# EAGLE board flossjtag-teardrops (EAGLE 7.4.0)
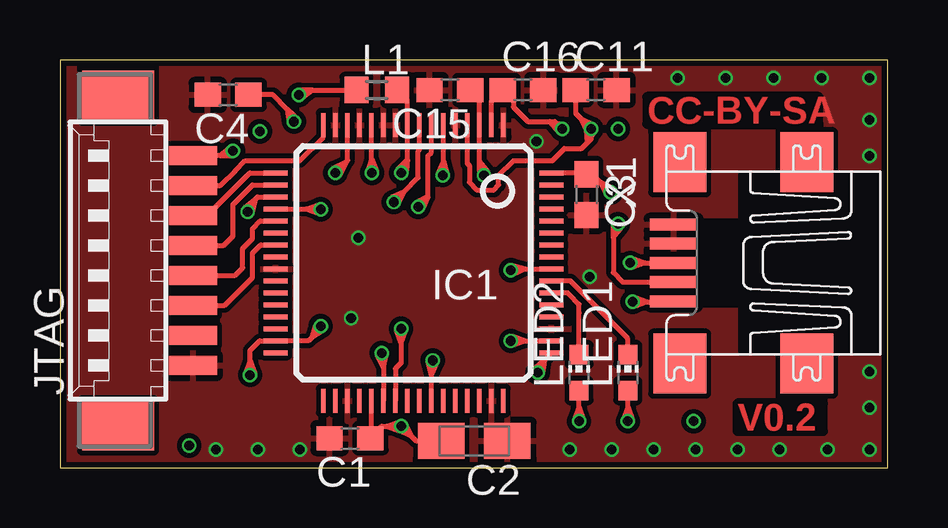
[diagram p0: board, top side]
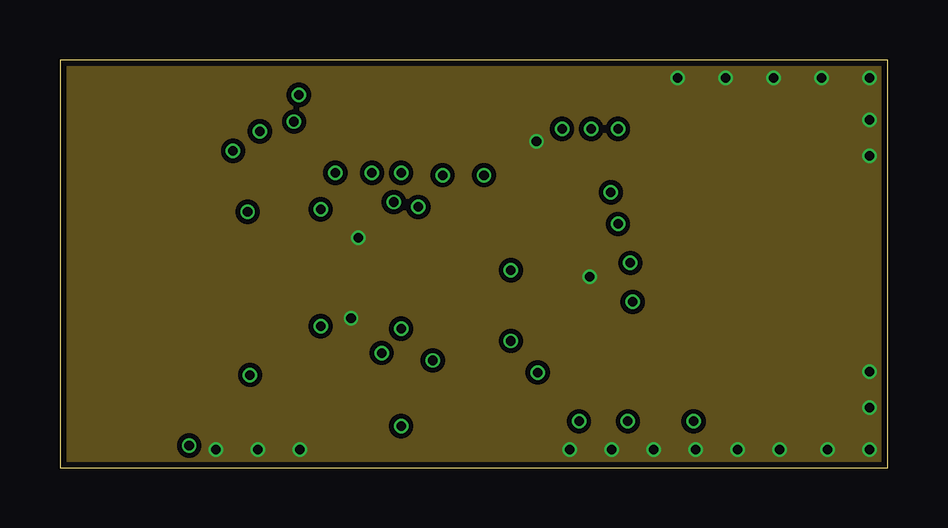
[diagram p1: board, inner layer Route2]
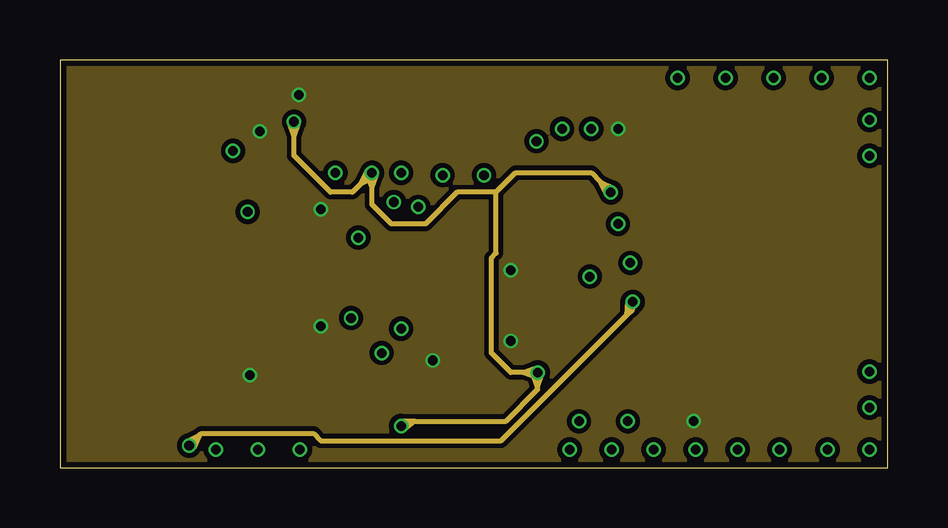
[diagram p2: board, inner layer Route15]
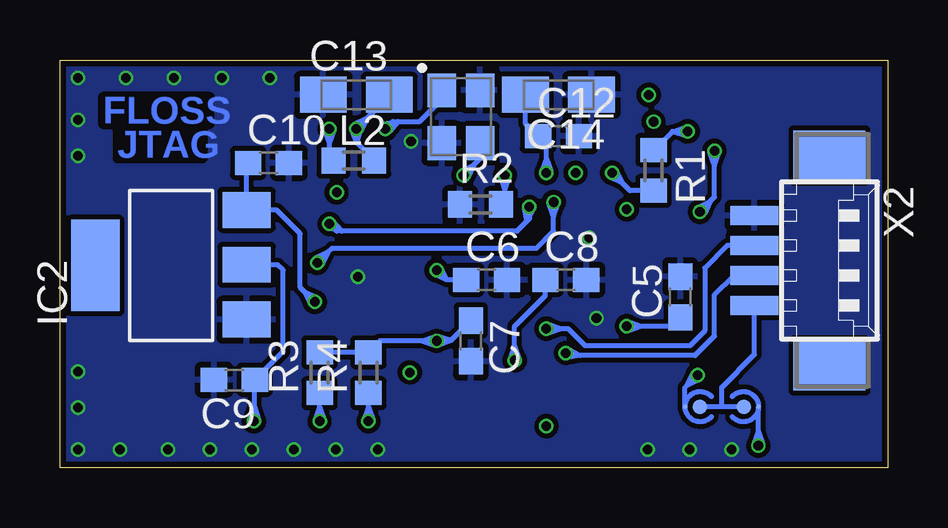
[diagram p3: board, bottom side, seen from below]

Size 34.5 x 17 mm. Coordinates in mm from the lower left corner, seen from the top.
Outline: 0,0 34.5,0 34.5,17 0,17 0,0
Copper layers (1*2+15*16): Top 0.035mm / dielectric 0.3mm / Route2 0.035mm / dielectric 0.15mm / Route15 0.035mm / dielectric 0.3mm / Bottom 0.035mm
Design rules "default *": minimum track width 7mil, minimum drill 0.4mm, track to track 8mil, track to pad 8mil, pad to pad 8mil, via to via 8mil, smd to smd 8mil, copper to edge 10mil, drill to drill 8mil, minimum pad ring 0.1mm, minimum via ring 0.1mm, stop-mask expansion 4mil, vias tented up to drill 0.4mm, thermal gap 10mil

## Footprints (pad centres in the part's own frame; a part is rotated, then mirrored left to right if it is on the bottom)
C0603 = smd 1.1 x 1: 1 -0.85,0; 2 0.85,0
A/3216-18R = smd 1.95 x 1.5: + 1.375,0; - -1.375,0
CIRC_JMP = smd 0.61 x 0.61: 1 0,0 | smd 0.203 x 0.203: 2 0,0.617
LQFP64 = smd 0.2 x 1: 1 -3.75,-5.75; 2 -3.25,-5.75; 3 -2.75,-5.75; 4 -2.25,-5.75; 5 -1.75,-5.75; 6 -1.25,-5.75; 7 -0.75,-5.75; 8 -0.25,-5.75; 9 0.25,-5.75; 10 0.75,-5.75; 11 1.25,-5.75; 12 1.75,-5.75; 13 2.25,-5.75; 14 2.75,-5.75; 15 3.25,-5.75; 16 3.75,-5.75; 33 3.75,5.75; 34 3.25,5.75; 35 2.75,5.75; 36 2.25,5.75; 37 1.75,5.75; 38 1.25,5.75; 39 0.75,5.75; 40 0.25,5.75; 41 -0.25,5.75; 42 -0.75,5.75; 43 -1.25,5.75; 44 -1.75,5.75; 45 -2.25,5.75; 46 -2.75,5.75; 47 -3.25,5.75; 48 -3.75,5.75 | smd 1 x 0.2: 17 5.75,-3.75; 18 5.75,-3.25; 19 5.75,-2.75; 20 5.75,-2.25; 21 5.75,-1.75; 22 5.75,-1.25; 23 5.75,-0.75; 24 5.75,-0.25; 25 5.75,0.25; 26 5.75,0.75; 27 5.75,1.25; 28 5.75,1.75; 29 5.75,2.25; 30 5.75,2.75; 31 5.75,3.25; 32 5.75,3.75; 49 -5.75,3.75; 50 -5.75,3.25; 51 -5.75,2.75; 52 -5.75,2.25; 53 -5.75,1.75; 54 -5.75,1.25; 55 -5.75,0.75; 56 -5.75,0.25; 57 -5.75,-0.25; 58 -5.75,-0.75; 59 -5.75,-1.25; 60 -5.75,-1.75; 61 -5.75,-2.25; 62 -5.75,-2.75; 63 -5.75,-3.25; 64 -5.75,-3.75
SOT223 = smd 1.499 x 2.007: 1 -2.261,-3.15; 2 0.025,-3.15; 3 2.311,-3.15 | smd 3.81 x 2.007: 4 0,3.15
53261-08 = smd 0.8 x 2: 1 4.375,-2.5; 2 3.125,-2.5; 3 1.875,-2.5; 4 0.625,-2.5; 5 -0.625,-2.5; 6 -1.875,-2.5; 7 -3.125,-2.5; 8 -4.375,-2.5 | smd 2.1 x 3: S1 6.875,0.625; S2 -6.875,0.625
R0603 = smd 1 x 1.1: 1 -0.85,0; 2 0.85,0
CHIP-LED0603 = smd 0.8 x 0.8: A 0,-0.75; C 0,0.75
UX60A-MB-5ST = smd 2 x 0.5: 1 2.25,1.6; 2 2.25,0.8; 3 2.25,0; 4 2.25,-0.8; 5 2.25,-1.6 | smd 2.2 x 2.5: M1 -3.3,-4.2; M2 -3.3,4.2; M3 2,4.2; M4 2,-4.2
53261-04 = smd 0.8 x 2: 1 1.875,-2.5; 2 0.625,-2.5; 3 -0.625,-2.5; 4 -1.875,-2.5 | smd 2.1 x 3: S1 4.375,0.625; S2 -4.375,0.625
NX3225SA = smd 1.4 x 1.2: 1 -1.1,-0.8; 2 1.1,-0.8; 3 1.1,0.8; 4 -1.1,0.8

## Placement (x,y rotation side)
C1  100n  [C0603]  12.09,1.22 180 top
C2  3u3  [A/3216-18R]  17.27,1.12 180 top
C3  100n  [C0603]  21.95,11.38 270 top
C4  100n  [C0603]  7.01,15.54 180 top
C5  100n  [C0603]  8.64,7.11 90 bottom
C6  100n  [C0603]  16.71,7.82 0 bottom
C7  100n  [C0603]  17.37,5.28 270 bottom
C8  100n  [C0603]  13.41,7.82 0 bottom
C9  100n  [C0603]  27.23,3.66 180 bottom
C10  100n  [C0603]  25.81,12.7 0 bottom
C11  100n  [C0603]  22.35,15.75 0 top
C12  100n  [C0603]  13.72,13.82 0 bottom
C13  4u7  [A/3216-18R]  22.15,15.54 0 bottom
C14  4u7  [A/3216-18R]  13.72,15.54 180 bottom
C15  27p  [C0603]  16.26,15.75 180 top
C16  27p  [C0603]  19.3,15.75 0 top
CJ1  CIRC_JMP  [CIRC_JMP]  5.99,2.54 270 bottom
CJ2  CIRC_JMP  [CIRC_JMP]  7.82,2.54 90 bottom
IC1  FT2232HL  [LQFP64]  14.73,8.53 180 top
IC2  REG1117  [SOT223]  29.87,8.43 90 bottom
JTAG  53261-08  [53261-08]  3.05,8.64 90 top
L1  [R0603]  13.21,15.75 0 top
L2  [R0603]  22.25,12.8 0 bottom
LED1  [CHIP-LED0603]  23.67,3.96 0 top
LED2  [CHIP-LED0603]  21.64,3.96 0 top
R1  1k  [R0603]  9.75,12.4 270 bottom
R2  12k  [R0603]  16.97,10.97 0 bottom
R3  220  [R0603]  23.67,3.96 90 bottom
R4  220  [R0603]  21.64,3.96 90 bottom
X1  MINI-USB-UX60A-MB-5ST  [UX60A-MB-5ST]  27.84,8.53 180 top
X2  53261-04  [53261-04]  3.05,8.64 270 bottom
X3  12MHz  [NX3225SA]  17.78,14.63 270 bottom

## Library data of the parts
C1-C16 R1-R4 = resistor
CJ1 CJ2 = fancy_jumpers
IC1 = ftdi
IC2 = burr-brown
JTAG X2 = con-molex
L1 L2 X3 = misc
LED1 LED2 = led
X1 = con-hirose

## Nets
+3V3: C5.1 C6.1 C7.1 C8.1 C9.1 CJ2.2 IC1.20 IC1.31 IC1.42 IC1.50 IC1.56 IC2.2 L1.1 L2.1 R1.1 R3.2 R4.2
+5V: C10.1 CJ1.2 IC2.3 X1.1
GND: C1.2 C2.- C3.2 C4.2 C5.2 C6.2 C7.2 C8.2 C9.2 C10.2 C11.2 C12.2 C13.- C14.- C15.2 C16.2 IC1.1 IC1.5 IC1.10 IC1.11 IC1.13 IC1.15 IC1.25 IC1.35 IC1.47 IC1.51 IC2.1 JTAG.8 R2.1 X1.4 X1.5 X2.4 X3.2 X3.4
N$1: IC1.14 R1.2
N$2: IC1.6 R2.2
N$3: IC1.7 X1.2
N$4: IC1.8 X1.3
N$5: CJ1.1 CJ2.1 X2.1
N$6: C16.1 IC1.2 X3.1
N$7: C12.1 C14.+ IC1.9 L1.2
N$8: C11.1 C13.+ IC1.4 L2.2
N$9: C15.1 IC1.3 X3.3
N$10: LED1.A R3.1
N$11: LED2.A R4.1
PWREN: IC1.60
RST: IC1.23 JTAG.6
RXD: IC1.39 X2.3
RXD_LED: IC1.54 LED2.C
TCK: IC1.16 JTAG.2
TDI: IC1.17 JTAG.3
TDO: IC1.18 JTAG.4
TMS: IC1.19 JTAG.1
TRST: IC1.21 JTAG.5
TXD: IC1.38 X2.2
TXD_LED: IC1.55 LED1.C
TXDEN: IC1.48
VCC: C1.1 C2.+ C3.1 C4.1 IC1.12 IC1.37 IC1.49 IC1.64

## Tracks (layer width: path | path; a pad name or v marks a point on that pad's centre or on a via)
+3V3  (via drill 0.4)
  Top 0.203: v15.54,4.47 15.48,4.41 15.48,3.87 | IC1.42 15.48,3.87 | IC1.50 19.4,5.28 | v18.8,5.28 19.4,5.28 | v7.92,3.86 7.92,4.46 | 7.92,4.46 7.92,4.88 8.33,5.28 IC1.31 | v10.87,5.89 10.87,5.79 10.5,5.42 | 10.5,5.42 10.36,5.28 9.04,5.28 | v10.87,10.77 10.86,10.78 10.27,10.78 | IC1.20 10.27,10.78 | v18.8,8.23 18.85,8.28 19.39,8.28 | 19.39,8.28 IC1.56 | v9.96,15.54 10.16,15.75 10.52,15.75 | 10.52,15.75 L1.1 | 10.5,5.42 10.98,5.72 v10.87,5.89 | 10.5,5.42 10.68,5.96 v10.87,5.89 | 15.48,3.87 15.72,4.38 v15.54,4.47 | 15.48,3.87 15.35,4.42 v15.54,4.47 | 19.39,8.28 18.84,8.42 v18.8,8.23 | 19.39,8.28 18.88,8.05 v18.8,8.23 | 10.27,10.78 10.8,10.58 v10.87,10.77 | 10.27,10.78 10.81,10.96 v10.87,10.77 | 10.52,15.75 9.96,15.74 v9.96,15.54 | 10.52,15.75 10.08,15.39 v9.96,15.54 | 19.4,5.28 18.86,5.47 v18.8,5.28 | 19.4,5.28 18.86,5.1 v18.8,5.28 | 7.92,4.46 7.74,3.93 v7.92,3.86 | 7.92,4.46 8.11,3.93 v7.92,3.86
  Bottom 0.203: C5.1 9.01,5.89 10.27,5.89 | 10.27,5.89 v10.87,5.89 | 17.1,5.86 C7.1 18.2,5.31 | 18.2,5.31 18.22,5.28 v18.8,5.28 | C6.1 18.36,7.82 | 18.36,7.82 18.39,7.82 v18.8,8.23 | C8.1 14.26,7.18 15.54,5.89 15.54,5.07 | v15.54,4.47 15.54,5.07 | R1.1 8.98,14.02 8.93,14.02 | 8.93,14.02 v8.33,14.02 | R3.2 R4.2 21.17,5.28 19.4,5.28 | v18.8,5.28 19.4,5.28 | IC2.2 25.43,8.46 25.2,8.23 25.2,4.84 C9.1 26.38,2.53 | 26.38,2.53 26.38,1.97 v26.42,1.93 | L2.1 23.27,12.97 23.27,13.52 | 23.27,13.52 v23.27,14.12 | CJ2.2 8.44,3.35 8.35,3.44 | 8.35,3.44 v7.92,3.86 | 10.27,5.89 10.8,5.71 v10.87,5.89 | 10.27,5.89 10.8,6.08 v10.87,5.89 | 15.54,5.07 15.36,4.54 v15.54,4.47 | 15.54,5.07 15.73,4.54 v15.54,4.47 | 18.36,7.82 18.87,8.05 v18.8,8.23 | 18.36,7.82 18.62,8.32 v18.8,8.23 | 23.27,13.52 23.45,14.06 v23.27,14.12 | 23.27,13.52 23.08,14.06 v23.27,14.12 | 8.93,14.02 8.4,14.21 v8.33,14.02 | 8.93,14.02 8.4,13.83 v8.33,14.02 | 26.38,2.53 26.23,1.98 v26.42,1.93 | 26.38,2.53 26.6,2.01 v26.42,1.93 | 18.2,5.31 18.72,5.1 v18.8,5.28 | 18.2,5.31 18.74,5.47 v18.8,5.28 | 19.4,5.28 18.86,5.47 v18.8,5.28 | 19.4,5.28 18.86,5.1 v18.8,5.28 | 8.35,3.44 8.1,3.95 v7.92,3.86 | 8.35,3.44 7.84,3.68 v7.92,3.86
  pour Route15: 0,0 34.5,0 34.5,17 0,17
+5V  (via drill 0.4)
  Top 0.203: X1.1 25.56,6.91 24.48,6.91 | v23.88,6.91 24.48,6.91 | 24.48,6.91 23.94,7.1 v23.88,6.91 | 24.48,6.91 23.94,6.72 v23.88,6.91
  Route15 0.203: v23.88,6.91 23.88,6.6 23.63,6.36 | 23.63,6.36 18.39,1.12 10.87,1.12 10.57,1.42 5.89,1.42 5.81,1.34 | v5.38,0.91 5.81,1.34 | 23.63,6.36 24.02,6.77 v23.88,6.91 | 23.63,6.36 23.68,6.92 v23.88,6.91 | 5.81,1.34 5.3,1.09 v5.38,0.91 | 5.81,1.34 5.56,0.83 v5.38,0.91
  Bottom 0.203: v23.88,6.91 24.3,7.33 | 24.3,7.33 24.49,7.52 24.49,9.75 25.48,10.74 IC2.3 26.72,12.64 C10.1 | v5.38,0.91 5.38,1.51 | 5.38,1.51 CJ1.2 | 24.3,7.33 23.79,7.09 v23.88,6.91 | 24.3,7.33 24.05,6.82 v23.88,6.91 | 5.38,1.51 5.2,0.98 v5.38,0.91 | 5.38,1.51 5.57,0.98 v5.38,0.91
GND  (via drill 0.4)
  other vias: 33.75,0.75 32,0.75 30,0.75 28.25,0.75 26.5,0.75 24.75,0.75 33.75,2.5 33.75,4 23,0.75 21.25,0.75 33.75,16.25 33.75,14.5 33.75,13 6.5,0.75 8.25,0.75 10,0.75 12.44,9.59 12.13,6.24 22.09,7.96 19.87,13.61 31.75,16.25 29.75,16.25 27.75,16.25 25.75,16.25
  pour Route2: 0,0 34.5,0 34.5,17 0,17
  pour Top: 0,0 34.5,0 34.5,17 0,17
  pour Bottom: 0,0 34.5,0 34.5,17 0,17
N$1  (via drill 0.4)
  Top 0.203: v11.48,12.29 11.9,12.72 | 11.9,12.72 12,12.81 11.98,12.83 IC1.14 | 11.9,12.72 11.39,12.47 v11.48,12.29 | 11.9,12.72 11.66,12.21 v11.48,12.29
  Bottom 0.203: R1.2 10.73,11.54 11.06,11.87 | 11.06,11.87 v11.48,12.29 | 11.06,11.87 11.57,12.12 v11.48,12.29 | 11.06,11.87 11.3,12.38 v11.48,12.29
N$2  (via drill 0.4)
  Top 0.203: 15.98,12.79 15.98,12.22 v15.95,12.19 | 15.98,12.79 IC1.6 | 15.98,12.79 15.77,12.27 v15.95,12.19 | 15.98,12.79 16.14,12.25 v15.95,12.19
  Bottom 0.203: R2.2 15.95,11.14 15.95,11.59 | 15.95,11.59 v15.95,12.19 | 15.95,11.59 16.14,12.13 v15.95,12.19 | 15.95,11.59 15.76,12.13 v15.95,12.19
N$3  (via drill 0.4)
  Top 0.203: 15.34,11.31 15.34,11.28 v14.94,10.87 | 15.34,11.31 15.34,13.01 15.48,13.14 IC1.7 | v23.27,10.16 23.06,9.96 23.06,9.6 | 23.06,9.6 23.06,8.13 23.46,7.73 X1.2 | 15.34,11.31 14.84,11.05 v14.94,10.87 | 15.34,11.31 15.12,10.79 v14.94,10.87 | 23.06,9.6 23.42,10.04 v23.27,10.16 | 23.06,9.6 23.07,10.16 v23.27,10.16
  Bottom 0.203: 15.02,10.28 14.94,10.36 v14.94,10.87 | 15.02,10.28 15.44,9.86 22.75,9.86 | 22.75,9.86 22.96,9.86 v23.27,10.16 | 15.02,10.28 15.13,10.83 v14.94,10.87 | 15.02,10.28 14.76,10.78 v14.94,10.87 | 22.75,9.86 23.3,9.96 v23.27,10.16 | 22.75,9.86 23.11,10.29 v23.27,10.16
N$4  (via drill 0.4)
  Top 0.203: v13.92,11.07 14.34,11.5 | 14.34,11.5 14.94,12.09 14.94,13.21 14.98,13.26 IC1.8 | v23.77,8.53 24.38,8.53 | 24.38,8.53 X1.3 | 14.34,11.5 13.83,11.25 v13.92,11.07 | 14.34,11.5 14.1,10.99 v13.92,11.07 | 24.38,8.53 23.84,8.72 v23.77,8.53 | 24.38,8.53 23.84,8.35 v23.77,8.53
  Bottom 0.203: 13.92,10.47 13.92,9.86 14.63,9.14 23.16,9.14 23.35,8.96 | 13.92,10.47 v13.92,11.07 | 23.35,8.96 v23.77,8.53 | 13.92,10.47 14.11,11.01 v13.92,11.07 | 13.92,10.47 13.73,11.01 v13.92,11.07 | 23.35,8.96 23.6,8.45 v23.77,8.53 | 23.35,8.96 23.86,8.71 v23.77,8.53
N$5
  Bottom 0.203: X2.1 5.55,4.71 6.91,3.35 6.91,2.54 | CJ1.1 6.91,2.54 | 6.91,2.54 CJ2.1
N$6  (via drill 0.4)
  Top 0.203: 20.41,14.43 19.51,14.43 18.9,15.04 18.9,15.3 C16.1 17.98,15.28 IC1.2 | 20.41,14.43 20.62,14.43 v20.93,14.12 | 20.41,14.43 20.78,13.99 v20.93,14.12 | 20.41,14.43 20.97,14.32 v20.93,14.12
  Bottom 0.203: X3.1 18.58,15.35 19.51,14.43 20.41,14.43 | 20.41,14.43 20.62,14.43 v20.93,14.12 | 20.41,14.43 20.78,13.99 v20.93,14.12 | 20.41,14.43 20.97,14.32 v20.93,14.12
N$7  (via drill 0.4)
  Top 0.203: 14.48,12.84 14.48,12.55 v14.22,12.29 | 14.48,12.84 IC1.9 14.48,15.32 L1.2 | 14.48,12.84 14.08,12.43 v14.22,12.29 | 14.48,12.84 14.42,12.27 v14.22,12.29
  Bottom 0.203: v14.22,12.29 14.22,12.89 | 14.22,12.89 14.22,13.53 14.52,13.82 C12.1 15.09,14.34 C14.+ | 14.22,12.89 14.04,12.36 v14.22,12.29 | 14.22,12.89 14.41,12.36 v14.22,12.29
N$8  (via drill 0.4)
  Top 0.203: C11.1 21.5,14.77 21.72,14.55 | v22.15,14.12 21.72,14.55 | 21.98,13.55 21.74,13.31 21.03,13.31 20.52,12.8 18.9,12.8 18.29,12.19 18.29,11.79 18.09,11.58 17.37,11.58 17.07,11.89 17.07,12.6 16.98,12.69 IC1.4 | 21.98,13.55 22.15,13.72 v22.15,14.12 | 21.72,14.55 21.97,14.04 v22.15,14.12 | 21.72,14.55 22.23,14.3 v22.15,14.12 | 21.98,13.55 22.31,14.01 v22.15,14.12 | 21.98,13.55 21.95,14.11 v22.15,14.12
  Bottom 0.203: v22.15,14.12 22.15,13.55 22.12,13.52 | 22.12,13.52 L2.2 | C13.+ 20.77,15.5 21.72,14.55 | v22.15,14.12 21.72,14.55 | 22.12,13.52 22.33,14.05 v22.15,14.12 | 22.12,13.52 21.96,14.06 v22.15,14.12 | 21.72,14.55 21.97,14.04 v22.15,14.12 | 21.72,14.55 22.23,14.3 v22.15,14.12
N$9  (via drill 0.4)
  Top 0.203: 17.48,12.76 17.48,12.39 v17.68,12.19 | 17.48,12.76 IC1.3 17.48,15.37 C15.1 | 17.48,12.76 17.48,12.19 v17.68,12.19 | 17.48,12.76 17.83,12.31 v17.68,12.19
  Bottom 0.203: X3.3 16.98,12.89 17.25,12.62 | v17.68,12.19 17.25,12.62 | 17.25,12.62 17.5,12.11 v17.68,12.19 | 17.25,12.62 17.76,12.37 v17.68,12.19
N$10  (via drill 0.4)
  Top 0.203: v23.67,1.93 23.67,2.53 | 23.67,2.53 LED1.A | 23.67,2.53 23.48,2 v23.67,1.93 | 23.67,2.53 23.86,2 v23.67,1.93
  Bottom 0.203: v23.67,1.93 23.67,2.53 | 23.67,2.53 R3.1 | 23.67,2.53 23.48,2 v23.67,1.93 | 23.67,2.53 23.86,2 v23.67,1.93
N$11  (via drill 0.4)
  Top 0.203: v21.64,1.93 21.64,2.53 | 21.64,2.53 LED2.A | 21.64,2.53 21.45,2 v21.64,1.93 | 21.64,2.53 21.83,2 v21.64,1.93
  Bottom 0.203: R4.1 LED2.A 21.64,2.53 | v21.64,1.93 21.64,2.53 | 21.64,2.53 21.45,2 v21.64,1.93 | 21.64,2.53 21.83,2 v21.64,1.93
RST
  Top 0.203: JTAG.6 6.86,6.76 8.03,7.92 8.03,8.94 8.37,9.28 IC1.23
RXD  (via drill 0.4)
  Top 0.203: v14.22,5.79 14.22,5.19 | 14.22,5.19 14.22,4.37 13.98,4.13 IC1.39 | 14.22,5.19 14.41,5.72 v14.22,5.79 | 14.22,5.19 14.04,5.72 v14.22,5.79
  Bottom 0.203: X2.3 6.69,9.26 7.62,8.33 7.62,5.69 8.23,5.08 12.6,5.08 13.31,5.79 13.62,5.79 | 13.62,5.79 v14.22,5.79 | 13.62,5.79 14.16,5.6 v14.22,5.79 | 13.62,5.79 14.16,5.98 v14.22,5.79
RXD_LED
  Top 0.203: LED2.C 21.64,6.46 21.64,6.81 21.23,7.21 21.16,7.28 IC1.54
TCK
  Top 0.203: IC1.16 10.98,13.78 10,12.8 7.92,12.8 7.72,12.8 7.32,12.39 6.68,11.76 JTAG.2
TDI
  Top 0.203: 8.97,12.29 IC1.17 7.92,12.28 7.82,12.19 6.14,10.51 JTAG.3
TDO
  Top 0.203: JTAG.4 6.82,9.26 7.21,9.65 7.21,10.97 8.03,11.78 IC1.18
TMS  (via drill 0.4)
  Top 0.203: v7.21,13.21 7.02,13.01 6.65,13.01 | 6.65,13.01 JTAG.1 | v7.82,10.67 7.82,10.87 8.13,11.18 | 8.13,11.18 8.24,11.28 IC1.19 | 8.13,11.18 7.7,10.82 v7.82,10.67 | 8.13,11.18 8.02,10.63 v7.82,10.67 | 6.65,13.01 7.21,13.01 v7.21,13.21 | 6.65,13.01 7.09,13.36 v7.21,13.21
  Bottom 0.203: 7.21,12.61 7.21,11.28 7.4,11.09 | 7.21,12.61 v7.21,13.21 | 7.4,11.09 v7.82,10.67 | 7.4,11.09 7.64,10.58 v7.82,10.67 | 7.4,11.09 7.91,10.85 v7.82,10.67 | 7.21,12.61 7.4,13.14 v7.21,13.21 | 7.21,12.61 7.03,13.14 v7.21,13.21
TRST
  Top 0.203: JTAG.5 7.3,8.01 7.62,8.33 7.62,9.14 8.03,9.55 8.03,9.96 8.35,10.28 IC1.21
TXD  (via drill 0.4)
  Top 0.203: v13.41,4.78 13.48,4.7 13.48,4.18 | 13.48,4.18 IC1.38 | 13.48,4.18 13.61,4.73 v13.41,4.78 | 13.48,4.18 13.23,4.69 v13.41,4.78
  Bottom 0.203: X2.2 6.42,8.01 7.21,7.21 7.21,5.49 8.03,4.67 12.82,4.67 | 12.82,4.67 13.31,4.67 v13.41,4.78 | 12.82,4.67 13.38,4.58 v13.41,4.78 | 12.82,4.67 13.31,4.95 v13.41,4.78
TXD_LED
  Top 0.203: LED1.C 23.67,5.08 23.67,5.38 21.34,7.72 21.27,7.78 IC1.55
VCC  (via drill 0.4)
  Top 0.203: v9.75,14.43 9.75,14.67 9.47,14.95 | 9.47,14.95 8.88,15.54 C4.1 | C1.1 12.98,1.26 | 12.98,1.26 IC1.37 | 12.98,1.26 13.01,1.28 13.01,1.32 13.41,1.73 13.62,1.73 | 13.62,1.73 v14.22,1.73 | v14.22,1.73 14.65,1.3 | 14.65,1.3 14.83,1.12 C2.+ | 20.19,4.49 19.91,4.22 v19.91,3.96 | 20.19,4.49 IC1.49 | v22.96,11.48 22.54,11.9 | 22.54,11.9 22.21,12.23 C3.1 21.89,12.28 IC1.64 | v13.01,12.29 12.98,12.32 12.98,12.89 | 12.98,12.89 IC1.12 | 9.47,14.95 9.56,14.39 v9.75,14.43 | 9.47,14.95 9.89,14.57 v9.75,14.43 | 12.98,12.89 12.81,12.35 v13.01,12.29 | 12.98,12.89 13.19,12.37 v13.01,12.29 | 22.54,11.9 22.78,11.39 v22.96,11.48 | 22.54,11.9 23.05,11.66 v22.96,11.48 | 20.19,4.49 19.78,4.11 v19.91,3.96 | 20.19,4.49 20.11,3.93 v19.91,3.96 | 13.62,1.73 14.16,1.54 v14.22,1.73 | 13.62,1.73 14.16,1.91 v14.22,1.73 | 14.65,1.3 14.4,1.81 v14.22,1.73 | 14.65,1.3 14.14,1.55 v14.22,1.73
  Route15 0.203: 9.75,13.83 9.75,13.01 11.28,11.48 12.19,11.48 12.58,11.87 | 9.75,13.83 v9.75,14.43 | v13.01,12.29 12.58,11.87 | 13.01,11.69 13.01,10.97 13.82,10.16 15.24,10.16 16.56,11.48 18.19,11.48 | 13.01,11.69 v13.01,12.29 | 18.19,11.48 19,12.29 22.15,12.29 22.54,11.9 | 22.54,11.9 v22.96,11.48 | 19.91,3.36 19.91,3.25 18.59,1.93 14.79,1.93 | 19.91,3.36 v19.91,3.96 | 18.19,11.48 18.19,8.94 17.98,8.74 17.98,4.78 18.8,3.96 19.31,3.96 | v19.91,3.96 19.31,3.96 | 14.79,1.93 14.43,1.93 v14.22,1.73 | 9.75,13.83 9.94,14.36 v9.75,14.43 | 9.75,13.83 9.57,14.36 v9.75,14.43 | 12.58,11.87 13.09,12.12 v13.01,12.29 | 12.58,11.87 12.83,12.38 v13.01,12.29 | 13.01,11.69 13.19,12.23 v13.01,12.29 | 13.01,11.69 12.82,12.23 v13.01,12.29 | 22.54,11.9 22.78,11.39 v22.96,11.48 | 22.54,11.9 23.05,11.66 v22.96,11.48 | 19.91,3.36 20.1,3.9 v19.91,3.96 | 19.91,3.36 19.73,3.9 v19.91,3.96 | 19.31,3.96 19.85,3.77 v19.91,3.96 | 19.31,3.96 19.85,4.15 v19.91,3.96 | 14.79,1.93 14.22,1.93 v14.22,1.73 | 14.79,1.93 14.35,1.57 v14.22,1.73

## Text on the board
Top: CC-BY-SA | V0.2
Bottom: FLOSS | JTAG
tStop: CC-BY-SA | V0.2
bStop: FLOSS | JTAG